# EAGLE board PCB (EAGLE 9.7.0)
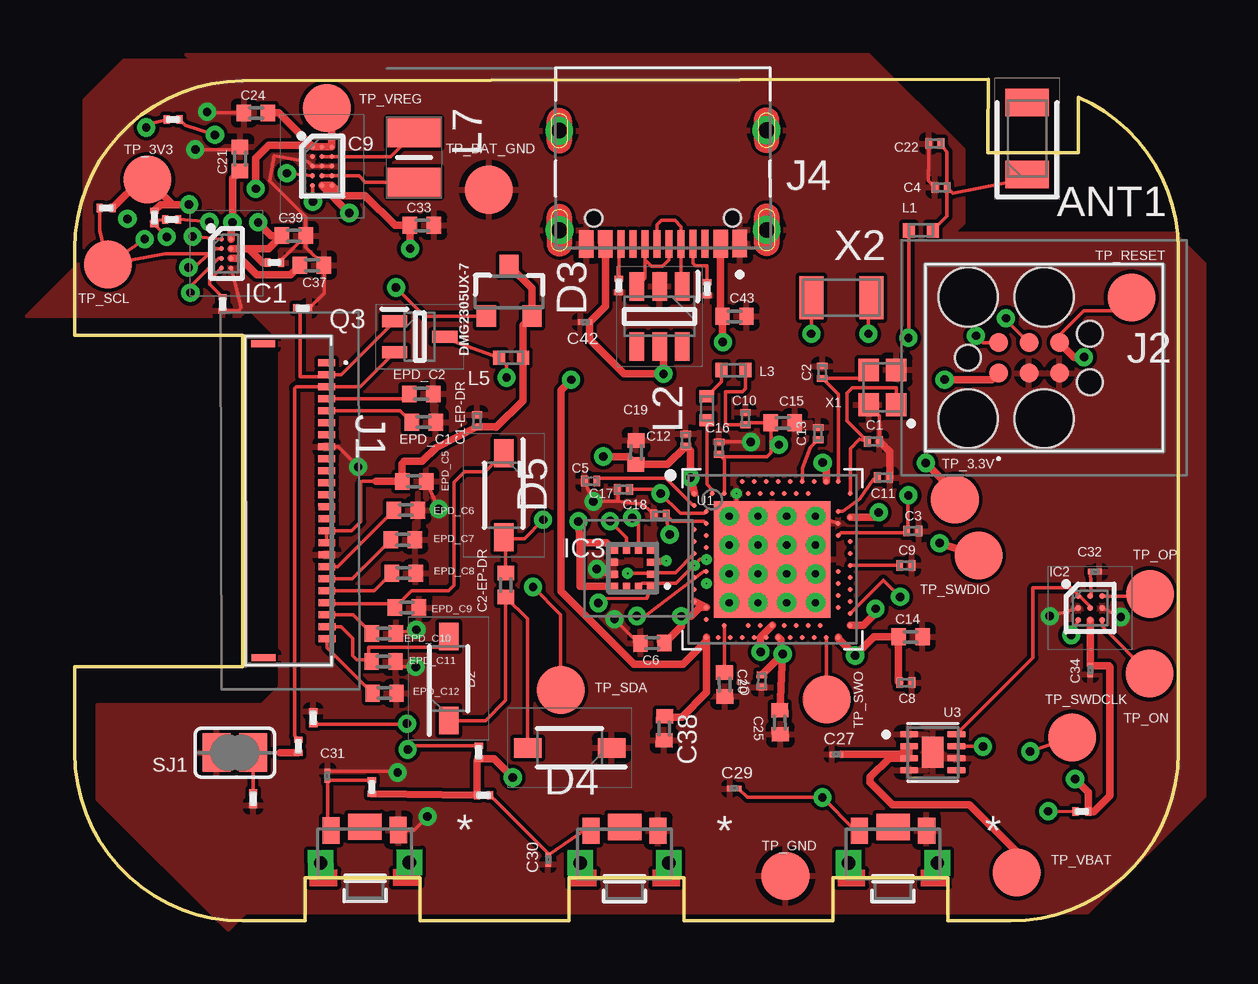
[diagram p0: board, top side]
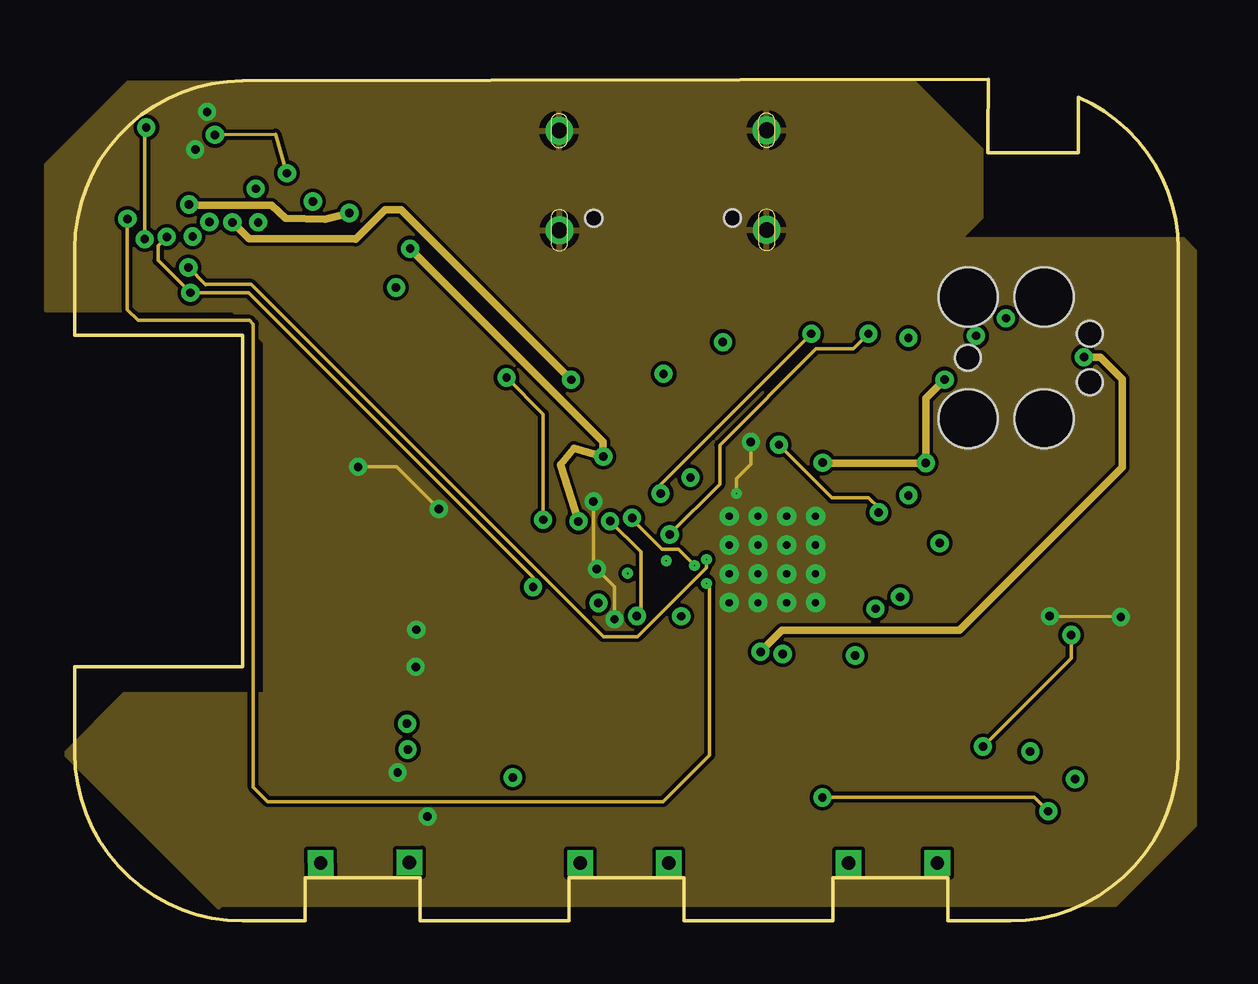
[diagram p1: board, inner layer Route2]
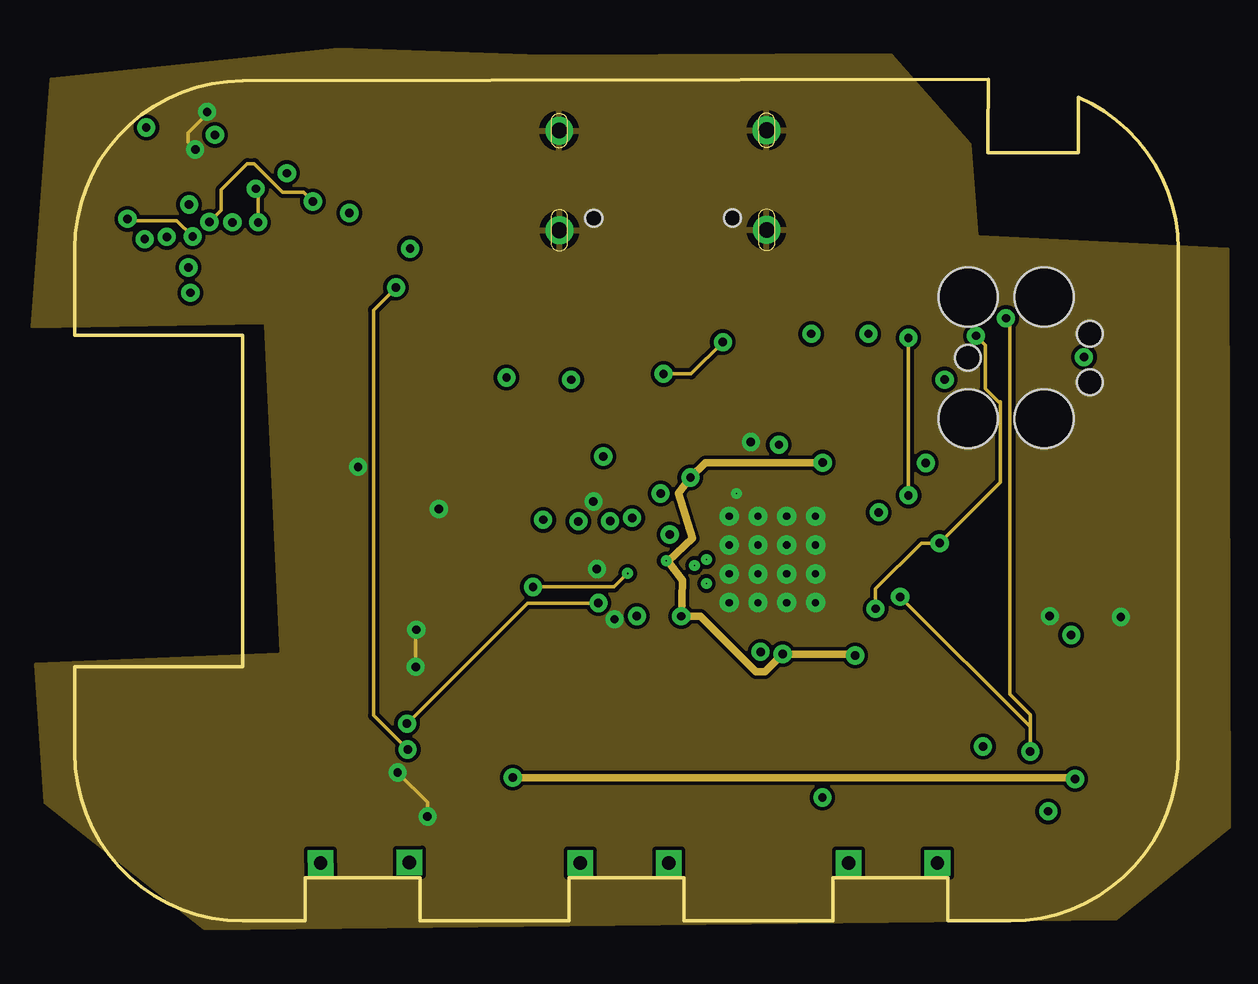
[diagram p2: board, inner layer Route15]
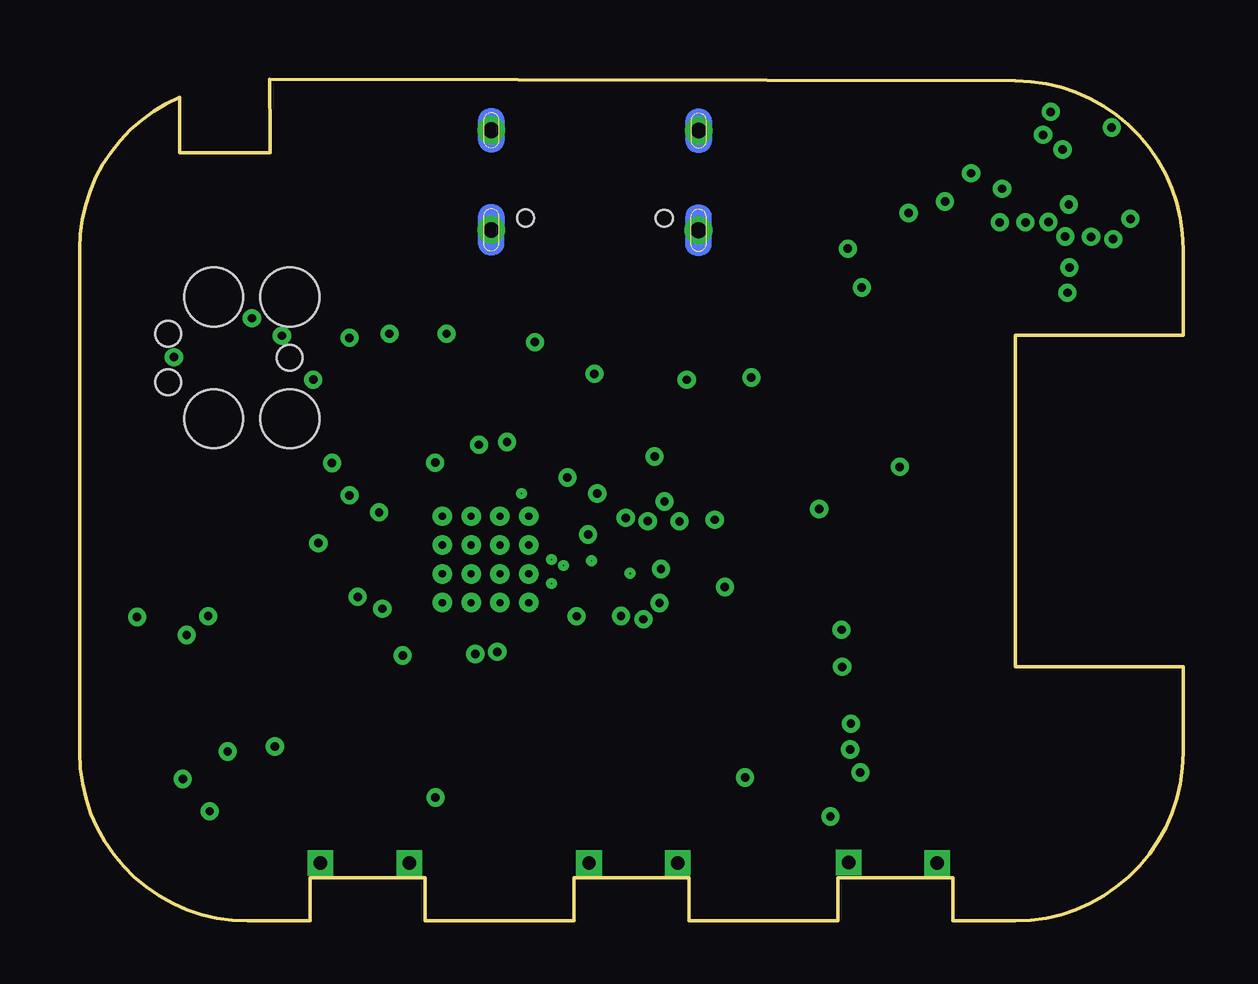
[diagram p3: board, bottom side, seen from below]

Size 46 x 35.07 mm. Coordinates in mm from the lower left corner, seen from the top.
Outline: 39,0 36.4,0 36.4,1.8 31.6,1.8 31.6,0 25.4,0 25.4,1.8 20.6,1.8 20.6,0 14.4,0 14.4,1.8 9.6,1.8 9.6,0 7,0 arc-90 0,7 0,10.6 7,10.6 7,24.4 0,24.4 0,28 arc-90 7,35 38.09,35.07 38.06,32.6 38.06,32 41.83,32 41.83,33.45 41.84,34.32 arc-67 46,28 46,7 arc-90 39,0
Copper layers (1+2*15+16): Top 0.035mm / dielectric 1.5mm / Route2 0.035mm / dielectric 0.15mm / Route15 0.035mm / dielectric 0.2mm / Bottom 0.035mm
Design rules "Fusion Electronics Design Rules.edru *": minimum track width 6mil, minimum drill 0.35mm, track to track 6mil, track to pad 6mil, pad to pad 6mil, via to via 6mil, smd to smd 6mil, copper to edge 0mil, drill to drill 6mil, minimum pad ring 10mil, minimum via ring 8mil, stop-mask expansion 4mil, vias tented up to drill 9999mil, thermal gap 10mil

## Footprints (pad centres in the part's own frame; a part is rotated, then mirrored left to right if it is on the bottom)
2450AT18B100E_ANTC3216X140N = smd 1.15 x 1.8: 1 -1.5,0; 2 1.5,0
NORDIC_NRF_3_RESC0201_L = smd 0.28 x 0.43: 1 -0.255,0; 2 0.255,0
PERFECT_0402_0402 = smd 0.6 x 0.7: 1 -0.5,0; 2 0.5,0
GRM011R60J152KE01L_1_0201 = smd 0.35 x 0.25: 1 0,0.275; 2 0,-0.275
GRM011R60J152KE01L_2_CAPC0201X13N = smd 0.22 x 0.23: 1 -0.185,0; 2 0.185,0
ESP32_C6_LIBRARY_5_SOD3716X135N = smd 1.15 x 0.8: 1 -1.75,0; 2 1.75,0
ESP32_C6_LIBRARY_3_SOT95P280X145-6N = smd 1.2 x 0.6: 1 -1.25,0.95; 2 -1.25,0; 3 -1.25,-0.95; 4 1.25,-0.95; 5 1.25,0; 6 1.25,0.95
ESP32_C6_LIBRARY_4_ESP32_C6_LIBRARY_4_ESP32_C6_LIBRARY_4_ESP32_C6_LIBRARY_4_ESP32_WROVER_SPARKFUN-DISCRETESEMI_SOT23-3 = smd 0.8 x 0.9: 1 -0.95,-1; 2 0.95,-1; 3 0,1.1
BQ25180YBGR_BGA8C40P2X4_100X155X50 = smd 0.2 x 0.2: A1 -0.2,0.6; A2 0.2,0.6; B1 -0.2,0.2; B2 0.2,0.2; C1 -0.2,-0.2; C2 0.2,-0.2; D1 -0.2,-0.6; D2 0.2,-0.6
DRV2605YZFR_BGA9C50P3X3_144X144X62 = smd 0.25 x 0.25: A1 -0.5,0.5; A2 0,0.5; A3 0.5,0.5; B1 -0.5,0; B2 0,0; B3 0.5,0; C1 -0.5,-0.5; C2 0,-0.5; C3 0.5,-0.5
BMA423_BMA423 = smd 0.3 x 0.35: 1 -0.75,-0.775; 2 -0.25,-0.775; 3 0.25,-0.775; 4 0.75,-0.775; 7 0.75,0.775; 8 0.25,0.775; 9 -0.25,0.775; 10 -0.75,0.775 | smd 0.35 x 0.3: 5 0.775,-0.25; 6 0.775,0.25; 11 -0.775,0.25; 12 -0.775,-0.25
RT6160AWSC_BGA15C40P3X5_140X230X60 = smd 0.216 x 0.216: A1 -0.4,0.8; A2 0,0.8; A3 0.4,0.8; B1 -0.4,0.4; B2 0,0.4; B3 0.4,0.4; C1 -0.4,0; C2 0,0; C3 0.4,0; D1 -0.4,-0.4; D2 0,-0.4; D3 0.4,-0.4; E1 -0.4,-0.8; E2 0,-0.8; E3 0.4,-0.8
503480-2400_5034802400 = smd 0.3 x 0.7: 1 -5.75,1.525; 2 -5.25,1.525; 3 -4.75,1.525; 4 -4.25,1.525; 5 -3.75,1.525; 6 -3.25,1.525; 7 -2.75,1.525; 8 -2.25,1.525; 9 -1.75,1.525; 10 -1.25,1.525; 11 -0.75,1.525; 12 -0.25,1.525; 13 0.25,1.525; 14 0.75,1.525; 15 1.25,1.525; 16 1.75,1.525; 17 2.25,1.525; 18 2.75,1.525; 19 3.25,1.525; 20 3.75,1.525; 21 4.25,1.525; 22 4.75,1.525; 23 5.25,1.525; 24 5.75,1.525 | smd 0.3 x 1: MP1 -6.54,-1.125; MP2 6.54,-1.125
TC2030-IDC_TC2030IDC = smd 0.783 x 0.783: 1 -0.953,-0.635; 2 -0.953,0.635; 3 0.317,-0.635; 4 0.317,0.635; 5 1.588,-0.635; 6 1.588,0.635 | hole 2.451: -2.223,-2.54; -2.223,2.54; 0.952,-2.54; 0.952,2.54 | hole 1.067: -2.223,0; 2.857,-1.016; 2.857,1.016
KH-TYPE-C-16P_KINGHELM_KH-TYPE-C-16P = smd 0.6 x 1.15: A1_B12 -3.2,4.725; A4_B9 -2.4,4.725; A9_B4 2.4,4.725; A12_B1 3.2,4.725 | smd 0.3 x 1.15: A5 -1.25,4.725; A6 -0.25,4.725; A7 0.25,4.725; A8 1.25,4.725; B5 1.75,4.725; B6 0.75,4.725; B7 -0.75,4.725; B8 -1.75,4.725 | drill 0.65 pad 1.05: SH1 -4.32,0; SH2 4.32,0; SH3 -4.32,4.15; SH4 4.32,4.15 | hole 0.7: -2.89,3.65; 2.89,3.65
NORDIC_NRF_2_RESC0402_L = smd 0.5 x 0.6: 1 -0.5,0; 2 0.5,0
MLP2016SR47MT0S1_INDC2016X100N = smd 1.2 x 2.2: 1 -1.028,0; 2 1.028,0
ESP32_C6_LIBRARY_6_SOT65P210X110-3N = smd 1.05 x 0.5: 1 -1.05,0.65; 2 -1.05,-0.65; 3 1.05,0
CPF0201D7K68C1_0201 = smd 0.35 x 0.25: 1 0,0.275; 2 0,-0.275
ESP32_C6_LIBRARY_7_JUMPER_SJ = smd 1.168 x 1.6: 1 -0.762,0; 2 0.762,0
2025-10-22_07-23-44_LIBRARY_SW_EVP-AKE31A_PAN = smd 0.711 x 1.092: 1 -1.4,-0.972; 2 1.4,-0.972 | drill 0.559 pad 0.914 square: 3 -1.848,0.381; 4 1.848,0.381 | smd 1.397 x 1.092: 5 0,-1.124
HECTOR_WATCH_1_TP20R = smd 2 x 2: TP 0,0
NORDIC_NRF_4_AQFN50P700X700X85_HS-74N = smd 4.85 x 4.85: P$74 0,0 | drill 0.3 pad 0.6: P$75 -1.8,1.8; P$76 -0.6,1.8; P$77 0.6,1.8; P$78 1.8,1.8; P$79 -1.8,0.6; P$80 -0.6,0.6; P$81 0.6,0.6; P$82 1.8,0.6; P$83 -1.8,-0.6; P$84 -0.6,-0.6; P$85 0.6,-0.6; P$86 1.8,-0.6; P$87 -1.8,-1.8; P$88 -0.6,-1.8; P$89 0.6,-1.8; P$90 1.8,-1.8 | smd 0.2 x 0.2: P$A8 -1.25,3.25; P$A10 -0.75,3.25; P$A12 -0.25,3.25; P$A14 0.25,3.25; P$A16 0.75,3.25; P$A18 1.25,3.25; P$A20 1.75,3.25; P$A22 2.25,3.25; P$A23 2.75,3.25; P$AA24 3.25,-2.25; P$AB2 -2.75,-2.5; P$AC5 -2,-2.75; P$AC9 -1,-2.75; P$AC11 -0.5,-2.75; P$AC13 0,-2.75; P$AC15 0.5,-2.75; P$AC17 1,-2.75; P$AC19 1.5,-2.75; P$AC21 2,-2.75; P$AC24 3.25,-2.75; P$AD2 -2.75,-3.25; P$AD4 -2.25,-3.25; P$AD6 -1.75,-3.25; P$AD8 -1.25,-3.25; P$AD10 -0.75,-3.25; P$AD12 -0.25,-3.25; P$AD14 0.25,-3.25; P$AD16 0.75,-3.25; P$AD18 1.25,-3.25; P$AD20 1.75,-3.25; P$AD22 2.25,-3.25; P$AD23 2.75,-3.25; P$B1 -3.25,2.75; P$B3 -2.5,2.75; P$B5 -2,2.75; P$B7 -1.5,2.75; P$B9 -1,2.75; P$B11 -0.5,2.75; P$B13 0,2.75; P$B15 0.5,2.75; P$B17 1,2.75; P$B19 1.5,2.75; P$B24 3.25,2.75; P$C1 -3.25,2.25; P$D2 -2.75,2; P$D23 2.75,2; P$E24 3.25,1.75; P$F2 -2.75,1.5; P$F23 2.75,1.5; P$G1 -3.25,1.25; P$H2 -2.75,1; P$H23 2.75,1; P$J1 -3.25,0.75; P$J24 3.25,0.75; P$K2 -2.75,0.5; P$L1 -3.25,0.25; P$L24 3.25,0.25; P$M2 -2.75,0; P$N1 -3.25,-0.25; P$N24 3.25,-0.25; P$P2 -2.75,-0.5; P$P23 2.75,-0.5; P$R1 -3.25,-0.75; P$R24 3.25,-0.75; P$T2 -2.75,-1; P$T23 2.75,-1; P$U1 -3.25,-1.25; P$U24 3.25,-1.25; P$V23 2.75,-1.5; P$W1 -3.25,-1.75; P$W24 3.25,-1.75; P$Y2 -2.75,-2; P$Y23 2.75,-2
ESP32_C6_LIBRARY_SON50P200X200X80-9N = smd 0.76 x 0.27: 1 -0.985,0.75; 2 -0.985,0.25; 3 -0.985,-0.25; 4 -0.985,-0.75; 5 0.985,-0.75; 6 0.985,-0.25; 7 0.985,0.25; 8 0.985,0.75 | smd 0.9 x 1.3: 9 0,0
NORDIC_NRF_BT-XTAL_2016_N = smd 0.95 x 0.85: 1 -0.725,-0.575; 2 0.725,-0.575; 3 0.725,0.575; 4 -0.725,0.575
NORDIC_NRF_1_XTAL_3215_N = smd 1 x 1.8: 1 -1.25,0; 2 1.25,0

## Placement (x,y rotation side)
ANT1  2450AT18B100E  [2450AT18B100E_ANTC3216X140N]  39.7,32.6 90 top
C1  12pF  [NORDIC_NRF_3_RESC0201_L]  33.3,19.98 0 top
C1-EP-DR  10uF  [NORDIC_NRF_3_RESC0201_L]  16.77,20.84 90 top
C2  12pF  [NORDIC_NRF_3_RESC0201_L]  31.16,22.86 90 top
C2-EP-DR  4.7uF/25V  [PERFECT_0402_0402]  17.97,13.99 90 top
C3  1pF  [NORDIC_NRF_3_RESC0201_L]  34.94,16.24 0 top
C4  1pF  [NORDIC_NRF_3_RESC0201_L]  36.11,30.56 180 top
C5  100nF  [NORDIC_NRF_3_RESC0201_L]  21.51,18.33 179.6 top
C6  4.7μF  [PERFECT_0402_0402]  24.08,11.57 181.1 top
C7  100nF  [NORDIC_NRF_3_RESC0201_L]  28.64,10 269.3 top
C8  100nF  [NORDIC_NRF_3_RESC0201_L]  34.64,9.93 0 top
C9  820pF N.C.  [NORDIC_NRF_3_RESC0201_L]  34.64,14.81 0 top
C10  N.C.  [NORDIC_NRF_3_RESC0201_L]  27.96,20.93 90 top
C11  100pF  [NORDIC_NRF_3_RESC0201_L]  33.72,18.48 0 top
C12  100nF  [NORDIC_NRF_3_RESC0201_L]  25.47,20.03 90.4 top
C13  N.C.  [NORDIC_NRF_3_RESC0201_L]  30.99,20.3 90 top
C14  4.7μF  [PERFECT_0402_0402]  34.84,11.84 0 top
C15  1.0μF  [PERFECT_0402_0402]  29.52,20.76 0.4 top
C16  47nF  [NORDIC_NRF_3_RESC0201_L]  26.86,19.7 89.7 top
C17  12pF  [NORDIC_NRF_3_RESC0201_L]  22.87,17.98 0 top
C18  12pF  [NORDIC_NRF_3_RESC0201_L]  24.41,16.91 0 top
C19  100nF  [PERFECT_0402_0402]  23.4,19.52 89.2 top
C20  4.7μF  [PERFECT_0402_0402]  27.09,9.85 270.5 top
C21  4.7μF  [PERFECT_0402_0402]  6.89,31.75 90 top
C22  N.C.  [NORDIC_NRF_3_RESC0201_L]  35.85,32.39 180 top
C23  0.1uF  [GRM011R60J152KE01L_1_0201]  8.32,27.43 90 top
C24  10uF  [PERFECT_0402_0402]  7.56,33.66 0 top
C25  22uF  [PERFECT_0402_0402]  29.4,8.28 271.1 top
C27  0.1uF  [GRM011R60J152KE01L_2_CAPC0201X13N]  31.76,6.94 0 top
C29  1uF  [GRM011R60J152KE01L_2_CAPC0201X13N]  27.49,5.52 0 top
C30  1uF  [GRM011R60J152KE01L_2_CAPC0201X13N]  19.74,2.55 90 top
C31  1uF  [GRM011R60J152KE01L_2_CAPC0201X13N]  10.54,6.05 269.9 top
C32  1uF  [GRM011R60J152KE01L_2_CAPC0201X13N]  42.52,14.56 180 top
C33  22uF  [PERFECT_0402_0402]  14.48,28.98 0 top
C34  0.1uF  [GRM011R60J152KE01L_2_CAPC0201X13N]  42.33,10.45 90 top
C37  1uF  [PERFECT_0402_0402]  9.89,27.33 0 top
C38  1uF  [PERFECT_0402_0402]  24.58,8.02 269.2 top
C39  10uF  [PERFECT_0402_0402]  9.14,28.56 0 top
C42  0.1uF  [GRM011R60J152KE01L_2_CAPC0201X13N]  21.27,24.95 180 top
C43  4.7uF  [PERFECT_0402_0402]  27.5,25.19 0 top
D2  MBR0530  [ESP32_C6_LIBRARY_5_SOD3716X135N]  15.59,10.09 90 top
D3  USBLC6-2SC6Y  [ESP32_C6_LIBRARY_3_SOT95P280X145-6N]  24.38,25.19 270 top
D4  MBR0530  [ESP32_C6_LIBRARY_5_SOD3716X135N]  20.63,7.21 180 top
D5  MBR0530  [ESP32_C6_LIBRARY_5_SOD3716X135N]  17.88,17.74 270 top
DMG2305UX-7  20V/4.2A/52mΩ/1.4W  [ESP32_C6_LIBRARY_4_ESP32_C6_LIBRARY_4_ESP32_C6_LIBRARY_4_ESP32_C6_LIBRARY_4_ESP32_WROVER_SPARKFUN-DISCRETESEMI_SOT23-3]  18.11,26.2 0 top
EPD_C1  1uF/50V  [PERFECT_0402_0402]  14.55,20.78 180 top
EPD_C2  1uF/50V  [PERFECT_0402_0402]  14.45,21.96 180 top
EPD_C5  0.1uF/50V  [PERFECT_0402_0402]  14.15,18.31 180 top
EPD_C6  1uF/50V  [PERFECT_0402_0402]  13.81,17.11 180 top
EPD_C7  1uF/50V  [PERFECT_0402_0402]  13.68,15.88 180 top
EPD_C8  1uF/50V  [PERFECT_0402_0402]  13.72,14.49 180 top
EPD_C9  1uF/50V  [PERFECT_0402_0402]  13.85,13.06 180 top
EPD_C10  1uF/50V  [PERFECT_0402_0402]  12.89,11.97 180 top
EPD_C11  1uF/50V  [PERFECT_0402_0402]  12.88,10.81 180 top
EPD_C12  1uF/50V  [PERFECT_0402_0402]  12.92,9.49 180 top
IC1  BQ25180YBGR  [BQ25180YBGR_BGA8C40P2X4_100X155X50]  6.32,27.81 0 top
IC2  DRV2605YZFR  [DRV2605YZFR_BGA9C50P3X3_144X144X62]  42.32,13.04 0 top
IC3  BMA423  [BMA423_BMA423]  23.25,14.7 90 top
IC9  RT6160AWSC  [RT6160AWSC_BGA15C40P3X5_140X230X60]  10.31,31.45 0 top
J1  503480-2400  [503480-2400_5034802400]  8.98,17.51 270.1 top
J2  TC2030-IDC  [TC2030-IDC_TC2030IDC]  39.46,23.46 0 top
J4  KH-TYPE-C-16P  [KH-TYPE-C-16P_KINGHELM_KH-TYPE-C-16P]  24.52,32.94 180.1 top
L1  3.9nH  [NORDIC_NRF_2_RESC0402_L]  35.26,28.77 0 top
L2  10μH  [NORDIC_NRF_2_RESC0402_L]  26.35,21.35 90 top
L3  15μH  [NORDIC_NRF_2_RESC0402_L]  27.45,22.95 0 top
L5  68uH  [NORDIC_NRF_2_RESC0402_L]  18.18,23.47 180 top
L7  FTC252012SR47MBCA  [MLP2016SR47MT0S1_INDC2016X100N]  14.15,31.81 270 top
Q3  SI1308EDL-T1-GE3  [ESP32_C6_LIBRARY_6_SOT65P210X110-3N]  14.38,24.34 0 top
R1_EP_DR  0.47  [CPF0201D7K68C1_0201]  9.32,7.28 180 top
R1_USB  5K1  [CPF0201D7K68C1_0201]  26.37,26.35 180 top
R2  0  [CPF0201D7K68C1_0201]  4.05,29.23 90 top
R2_EP_DR  10K  [CPF0201D7K68C1_0201]  9.5,25.53 270 top
R2_USB  5K1  [CPF0201D7K68C1_0201]  22.68,26.48 0 top
R3  0  [CPF0201D7K68C1_0201]  9.94,8.46 0 top
R4  0  [CPF0201D7K68C1_0201]  4.1,33.39 90 top
R5  10k  [CPF0201D7K68C1_0201]  17.04,5.24 270 top
R7  10k  [CPF0201D7K68C1_0201]  41.98,4.56 90 top
R8  10k  [CPF0201D7K68C1_0201]  12.39,5.58 0 top
R9  10k  [CPF0201D7K68C1_0201]  6.17,25.7 180 top
R17  3K3  [CPF0201D7K68C1_0201]  1.32,29.71 270 top
R18  3K3  [CPF0201D7K68C1_0201]  3.32,29.31 0 top
R_PWR_EPD  10K  [CPF0201D7K68C1_0201]  16.84,7.02 0 top
R_TYPE_SEL  2.2  [CPF0201D7K68C1_0201]  7.44,5.09 180 top
SJ1  [ESP32_C6_LIBRARY_7_JUMPER_SJ]  6.68,7.01 0 top
SW_DN  2025-10-22_07-23-44_LIBRARY_EVP-AKE31ASW_EVP-AKE31A_PAN  [2025-10-22_07-23-44_LIBRARY_SW_EVP-AKE31A_PAN]  34.11,2.79 180 top
SW_ENT  2025-10-22_07-23-44_LIBRARY_EVP-AKE31ASW_EVP-AKE31A_PAN  [2025-10-22_07-23-44_LIBRARY_SW_EVP-AKE31A_PAN]  12.1,2.81 180.4 top
SW_UP  2025-10-22_07-23-44_LIBRARY_EVP-AKE31ASW_EVP-AKE31A_PAN  [2025-10-22_07-23-44_LIBRARY_SW_EVP-AKE31A_PAN]  22.92,2.79 180 top
TP_3.3V  HECTOR_WATCH_1_TPTP20R  [HECTOR_WATCH_1_TP20R]  36.69,17.57 0 top
TP_3V3  HECTOR_WATCH_1_TPTP20R  [HECTOR_WATCH_1_TP20R]  3.03,30.89 0 top
TP_BAT_GND  HECTOR_WATCH_1_TPTP20R  [HECTOR_WATCH_1_TP20R]  17.27,30.46 0 top
TP_GND  HECTOR_WATCH_1_TPTP20R  [HECTOR_WATCH_1_TP20R]  29.63,1.88 0 top
TP_ON  HECTOR_WATCH_1_TPTP20R  [HECTOR_WATCH_1_TP20R]  44.8,10.3 0 top
TP_OP  HECTOR_WATCH_1_TPTP20R  [HECTOR_WATCH_1_TP20R]  44.82,13.63 0 top
TP_RESET  HECTOR_WATCH_1_TPTP20R  [HECTOR_WATCH_1_TP20R]  44.05,25.98 0 top
TP_SCL  HECTOR_WATCH_1_TPTP20R  [HECTOR_WATCH_1_TP20R]  1.39,27.36 0 top
TP_SDA  HECTOR_WATCH_1_TPTP20R  [HECTOR_WATCH_1_TP20R]  20.25,9.62 0 top
TP_SWDCLK  HECTOR_WATCH_1_TPTP20R  [HECTOR_WATCH_1_TP20R]  41.57,7.65 0 top
TP_SWDIO  HECTOR_WATCH_1_TPTP20R  [HECTOR_WATCH_1_TP20R]  37.67,15.23 0 top
TP_SWO  HECTOR_WATCH_1_TPTP20R  [HECTOR_WATCH_1_TP20R]  31.34,9.22 0 top
TP_VBAT  HECTOR_WATCH_1_TPTP20R  [HECTOR_WATCH_1_TP20R]  39.26,2.02 0 top
TP_VREG  HECTOR_WATCH_1_TPTP20R  [HECTOR_WATCH_1_TP20R]  10.51,33.87 0 top
U1  NRF52840_QF  [NORDIC_NRF_4_AQFN50P700X700X85_HS-74N]  29.08,15.06 0 top
U3  MAX17048G+T10  [ESP32_C6_LIBRARY_SON50P200X200X80-9N]  35.76,7.03 0 top
X1  32MHz  [NORDIC_NRF_BT-XTAL_2016_N]  33.67,22.23 90 top
X2  32.768kHz  [NORDIC_NRF_1_XTAL_3215_N]  31.95,25.97 0 top

## Library data of the parts
ANT1 = InkTime_v5; ARROW_PART_NUMBER: 2450AT18B100E; ARROW_PRICE-STOCK: https://www.arrow.com/en/products/2450at18b100e/johanson-dielectrics?utm_currency=USD&region=nac; DESCRIPTION: Antennas 2.45GHz ANTENNA; HEIGHT: 1.4mm; MANUFACTURER_NAME: JOHANSON TECHNOLOGY; MANUFACTURER_PART_NUMBER: 2450AT18B100E; MOUSER_PART_NUMBER: 609-2450AT18B100E; MOUSER_PRICE-STOCK: https://www.mouser.co.uk/ProductDetail/Johanson-Technology/2450AT18B100E?qs=yCnrNFeXz%252Bh5MFsFIXGZGA%3D%3D
C1 C1-EP-DR C2 C2-EP-DR C3-C25 C33 C37-C39 C43 EPD_C1 EPD_C2 EPD_C5-EPD_C12 L1-L3 L5 R1_EP_DR R1_USB R2 R2_EP_DR R2_USB R3-R5 R7-R9 R17 R18 R_PWR_EPD R_TYPE_SEL SJ1 TP_3.3V TP_3V3 TP_BAT_GND TP_GND TP_ON TP_OP TP_RESET TP_SCL TP_SDA TP_SWDCLK TP_SWDIO TP_SWO TP_VBAT TP_VREG U1 X1 X2 = InkTime_v5
C27 C29-C32 C34 C42 = InkTime_v5; AVAILABILITY: In Stock; CHECK_PRICES: https://www.snapeda.com/parts/GRM011R60J152KE01L/Murata/view-part/?ref=eda; DESCRIPTION: SMD Capacitor X5R(EIA) with Capacitance: 1500pF Tol. 10%. Rated Voltage: 6.3Vdc; MF: Murata; MP: GRM011R60J152KE01L; PACKAGE: 0201 Murata; PRICE: None; SNAPEDA_LINK: https://www.snapeda.com/parts/GRM011R60J152KE01L/Murata/view-part/?ref=snap
D2 D4 D5 = InkTime_v5; AVAILABILITY: In Stock; CHECK_PRICES: https://www.snapeda.com/parts/MBR0530/Onsemi/view-part/?ref=eda; DESCRIPTION: Diode Schottky 30 V 500mA Surface Mount SOD-123; MF: ON Semiconductor; MP: MBR0530; PACKAGE: SOD-123-2 ON Semiconductor; PRICE: None; PURCHASE-URL: https://www.snapeda.com/api/url_track_click_mouser/?unipart_id=179458&manufacturer=ON Semiconductor&part_name=MBR0530&search_term=None; SNAPEDA_LINK: https://www.snapeda.com/parts/MBR0530/Onsemi/view-part/?ref=snap
D3 = InkTime_v5; AVAILABILITY: In Stock; CHECK_PRICES: https://www.snapeda.com/parts/USBLC6-2SC6Y/STMicroelectronics/view-part/?ref=eda; DESCRIPTION: 17V Clamp 5A (8/20µs) Ipp Tvs Diode Surface Mount SOT-23-6; MF: STMicroelectronics; MP: USBLC6-2SC6Y; PACKAGE: SOT-23-6 STMicroelectronics; PRICE: None; SNAPEDA_LINK: https://www.snapeda.com/parts/USBLC6-2SC6Y/STMicroelectronics/view-part/?ref=snap
DMG2305UX-7 = InkTime_v5; PROD_ID: TRAN-14388
IC1 = InkTime_v5; ARROW_PART_NUMBER: BQ25180YBGR; ARROW_PRICE-STOCK: https://www.arrow.com/en/products/bq25180ybgr/texas-instruments?utm_currency=USD&region=nac; DESCRIPTION: Charger IC Lithium Ion/Polymer, Lithium Iron Phosphate 8-DSBGA (1.6x1.1); HEIGHT: 0.5mm; MANUFACTURER_NAME: Texas Instruments; MANUFACTURER_PART_NUMBER: BQ25180YBGR; MOUSER_PART_NUMBER: 595-BQ25180YBGR; MOUSER_PRICE-STOCK: https://www.mouser.co.uk/ProductDetail/Texas-Instruments/BQ25180YBGR?qs=doiCPypUmgEWjAK%252BJAX6Tw%3D%3D
IC2 = InkTime_v5; ARROW_PART_NUMBER: DRV2605YZFR; ARROW_PRICE-STOCK: https://www.arrow.com/en/products/drv2605yzfr/texas-instruments?region=nac; DESCRIPTION: Haptic Driver for ERM/LRA with Built-In Library and Smart Loop Architecture; HEIGHT: 0.625mm; MANUFACTURER_NAME: Texas Instruments; MANUFACTURER_PART_NUMBER: DRV2605YZFR
IC3 = InkTime_v5; ARROW_PART_NUMBER: BMA423; ARROW_PRICE-STOCK: https://www.arrow.com/en/products/bma423/bosch; DESCRIPTION: Accelerometers Triaxial low-g 12bit Acceleration Sensor; HEIGHT: 1mm; MANUFACTURER_NAME: BOSCH; MANUFACTURER_PART_NUMBER: BMA423; MOUSER_PART_NUMBER: 262-BMA423; MOUSER_PRICE-STOCK: https://www.mouser.co.uk/ProductDetail/Bosch-Sensortec/BMA423?qs=HXFqYaX1Q2xC%252BSgeGoX3mg%3D%3D
IC9 = InkTime_v5; DESCRIPTION: Buck-Boost Regulator Positive Output Step-Up/Step-Down I2C DC-DC Controller IC 15-WL-CSP (BSC) (1.4x2.3); HEIGHT: 0.6mm; MANUFACTURER_NAME: RICHTEK; MANUFACTURER_PART_NUMBER: RT6160AWSC; MOUSER_PART_NUMBER: 835-RT6160AWSC; MOUSER_PRICE-STOCK: https://www.mouser.co.uk/ProductDetail/Richtek/RT6160AWSC?qs=amGC7iS6iy%2FLd9PSoixZXQ%3D%3D
J1 = InkTime_v5; DESCRIPTION: FFC & FPC Connectors 0.5mm FPC RA SMT Dual Contact 24Ckt; HEIGHT: 1.87mm; MANUFACTURER_NAME: Molex; MANUFACTURER_PART_NUMBER: 503480-2400; MOUSER_PART_NUMBER: 538-503480-2400; MOUSER_PRICE-STOCK: https://www.mouser.co.uk/ProductDetail/Molex/503480-2400?qs=OAhjpuo3Vu7efIoxFh9AOw%3D%3D
J2 = InkTime_v5; DESCRIPTION: CABLE ADAPTER 6 POS; HEIGHT: 19mm; MANUFACTURER_NAME: Tag Connect; MANUFACTURER_PART_NUMBER: TC2030-IDC
J4 = InkTime_v5; AVAILABILITY: Not in stock; CHECK_PRICES: https://www.snapeda.com/parts/KH-TYPE-C-16P/Kinghelm/view-part/?ref=eda; MF: kinghelm; MP: KH-TYPE-C-16P; PACKAGE: None; PRICE: None; SNAPEDA_LINK: https://www.snapeda.com/parts/KH-TYPE-C-16P/Kinghelm/view-part/?ref=snap
L7 = InkTime_v5; DESCRIPTION: SMD / SMT Inductors (Coils), L=0.47?H, L x W x T :; HEIGHT: 1mm; JLCPCB: https://jlcpcb.com/partdetail/6763488-FTC252012SR47MBCA/C5832368; MANUFACTURER_NAME: TDK; MANUFACTURER_PART_NUMBER: FTC252012SR47MBCA
Q3 = InkTime_v5; AVAILABILITY: In Stock; CHECK_PRICES: https://www.snapeda.com/parts/SI1308EDL-T1-GE3/Vishay+Siliconix/view-part/?ref=eda; DESCRIPTION: Si1308EDL-T1-GE3 N-channel MOSFET Transistor, 1.5 A, 30 V, 3-Pin SC-70 | Siliconix / Vishay SI1308EDL-T1-GE3; MF: Vishay Siliconix; MP: SI1308EDL-T1-GE3; PACKAGE: SOT-323 Vishay Semiconductor; PRICE: None; PURCHASE-URL: https://www.snapeda.com/api/url_track_click_mouser/?unipart_id=274603&manufacturer=Vishay Siliconix&part_name=SI1308EDL-T1-GE3&search_term=None; SNAPEDA_LINK: https://www.snapeda.com/parts/SI1308EDL-T1-GE3/Vishay+Siliconix/view-part/?ref=snap
SW_DN SW_ENT SW_UP = InkTime_v5; COPYRIGHT: Copyright (C) 2025 Ultra Librarian. All rights reserved.; DIGI-KEY_PART_NUMBER_1: P123437TR-ND; DIGI-KEY_PART_NUMBER_2: P123437CT-ND; DIGI-KEY_PART_NUMBER_3: P123437DKR-ND; MANUFACTURER_NAME: Panasonic; MANUFACTURER_PART_NUMBER: EVP-AKE31A
U3 = InkTime_v5; AVAILABILITY: In Stock; CHECK_PRICES: https://www.snapeda.com/parts/MAX17048G+T10/Analog+Devices/view-part/?ref=eda; DESCRIPTION: 3µA 1-Cell/2-Cell Fuel Gauge with ModelGauge; MF: Analog Devices; MP: MAX17048G+T10; PACKAGE: TDFN-8 Maxim; PRICE: None; PURCHASE-URL: https://www.snapeda.com/api/url_track_click_mouser/?unipart_id=329239&manufacturer=Analog Devices&part_name=MAX17048G+T10&search_term=None; SNAPEDA_LINK: https://www.snapeda.com/parts/MAX17048G+T10/Analog+Devices/view-part/?ref=snap

## Nets
3V3/1.7D: C34.2 IC2.C2 R5.2 R7.2 R8.2 R_PWR_EPD.2
3V3/2.4A: C6.1 C7.1 C8.1 C12.1 C14.1 C19.1 C25.1 C33.1 IC3.3 IC3.7 IC3.10 IC9.E2 IC9.E3 J2.1 R17.1 R18.1 TP_3.3V.TP TP_3V3.TP U1.P$A22 U1.P$AD14 U1.P$AD23 U1.P$B1 U1.P$W1 U1.P$Y2
ALERT/1.6C: U3.5
ALERT/2.5C: U1.P$J24
D+/1.5D: D3.4
D+/2.7D: U1.P$AD6
D-/1.5D: D3.6
D-/2.7D: U1.P$AD4
DEC1: C5.1 U1.P$C1
DEC3: C11.1 U1.P$D23
DEC4_6: C10.1 C15.1 C16.1 L3.2 U1.P$B5 U1.P$E24
DN: D3.1 J4.A7 J4.B7
DP: D3.3 J4.A6 J4.B6
EPD_3V3: C1-EP-DR.1 DMG2305UX-7.2 DMG2305UX-7.3 EPD_C5.2 J1.15 J1.16 L5.1
EPD_BUSY/1.5D: J1.9
EPD_BUSY/2.2D: U1.P$AD12
EPD_CS/1.4C: J1.12
EPD_CS/2.2D: U1.P$K2
EPD_DC/1.5D: J1.11
EPD_DC/2.2D: U1.P$AD10
EPD_RST/1.5D: J1.10
EPD_RST/2.2D: U1.P$AC11
GDR: J1.2 Q3.1 R2_EP_DR.2
GND: C1-EP-DR.2 C1.2 C2.2 C3.2 C4.2 C5.2 C6.2 C7.2 C8.2 C9.2 C10.2 C11.2 C12.2 C13.2 C14.2 C15.2 C16.2 C17.1 C18.1 C19.2 C20.2 C21.2 C22.2 C23.2 C24.1 C25.2 C27.1 C29.1 C30.1 C31.1 C32.1 C33.2 C34.1 C37.2 C38.2 C39.2 C42.2 C43.2 D3.2 D4.1 EPD_C1.1 EPD_C2.1 EPD_C5.1 EPD_C6.1 EPD_C7.1 EPD_C8.1 EPD_C9.1 EPD_C10.1 EPD_C11.1 EPD_C12.1 IC1.D2 IC2.B1 IC2.B3 IC3.8 IC3.9 IC9.B1 IC9.C1 IC9.C2 IC9.C3 J1.8 J1.17 J1.MP1 J1.MP2 J2.3 J2.5 J4.A1_B12 J4.A12_B1 J4.SH1 J4.SH2 J4.SH3 J4.SH4 R1_USB.1 R2_EP_DR.1 R2_USB.2 R3.1 R9.1 R_TYPE_SEL.1 SJ1.1 SW_DN.1 SW_ENT.1 SW_UP.1 TP_BAT_GND.TP TP_GND.TP U1.P$74 U1.P$75 U1.P$76 U1.P$77 U1.P$78 U1.P$79 U1.P$80 U1.P$81 U1.P$82 U1.P$83 U1.P$84 U1.P$85 U1.P$86 U1.P$87 U1.P$88 U1.P$89 U1.P$90 U1.P$B7 U1.P$F23 U3.1 U3.4 U3.6 U3.9 X1.2 X1.4
HAPTIC_EN/1.4C: IC2.A1
HAPTIC_EN/2.6A: U1.P$U1
IMU_INT1: IC3.5 U1.P$N1
IMU_INT2: IC3.6 U1.P$P2
LX1: IC9.B2 IC9.B3 L7.1
LX2: IC9.D2 IC9.D3 L7.2
MOSI/1.5B: J1.14
MOSI/2.2D: U1.P$B13
N$1: IC1.D1 R9.2
N$2: IC9.D1 R4.2
N$3: IC9.E1 R2.2
N$4: C20.1 U1.P$AC5
N$5: C2-EP-DR.1 D2.1 D4.2
N$6: C9.1 U1.P$N24
N$7: C2-EP-DR.2 D5.2 L5.2 Q3.3
N$8: C3.1 L1.1 U1.P$H23
N$9: IC3.1 R3.2
N$10: C1.1 U1.P$B24 X1.1
N$11: J4.B5 R2_USB.1
N$12: R1_EP_DR.1 R_TYPE_SEL.2 SJ1.2
N$13: C13.1 U1.P$A18
N$14: ANT1.1 C4.1 C22.1 L1.2
N$15: C32.2 IC2.A2
N$16: J4.A5 R1_USB.2
N$19: C2.1 U1.P$A23 X1.3
N$20: L2.2 L3.1
N$21: L2.1 U1.P$B3
N$27: EPD_C6.2 J1.18
N$28: EPD_C7.2 J1.19
N$29: EPD_C8.2 J1.20
N$31: EPD_C10.2 J1.22
N$33: EPD_C12.2 J1.24
N$34: EPD_C2.2 J1.4
N$35: EPD_C1.2 J1.5
OUT+: IC2.A3 TP_OP.TP
OUT-: IC2.C3 TP_ON.TP
P0.00/XL1: C17.2 U1.P$D2 X2.1
P0.01/XL2: C18.2 U1.P$F2 X2.2
P0.04: U1.P$J1
P0.09: U1.P$L24
P0.13/1.5D: C30.2 R5.1 SW_UP.2
P0.13/2.6C: U1.P$AD8
P0.14/1.5D: C31.2 R8.1 SW_ENT.2
P0.14/2.7C: U1.P$AC9
P0.19: U1.P$AC15
P0.20: U1.P$AD16
P0.21: U1.P$AC17
P0.22: U1.P$AD18
P0.23: U1.P$AC19
P0.24: U1.P$AD20
P0.25: U1.P$AC21
P0.26: U1.P$G1
P0.27: U1.P$H2
P0.28: U1.P$B11
P0.29: U1.P$A10
P0.30: U1.P$B9
P0.31: U1.P$A8
P1.01/1.6C: DMG2305UX-7.1 R_PWR_EPD.1
P1.01/2.4B: U1.P$Y23
P1.02/1.6C: C29.2 R7.1 SW_DN.2
P1.02/2.8C: U1.P$W24
P1.03: U1.P$V23
P1.04: U1.P$U24
P1.05: U1.P$T23
P1.06: U1.P$R24
P1.07: U1.P$P23
P1.09: U1.P$R1
P1.10: U1.P$A20
P1.11: U1.P$B19
P1.12: U1.P$B17
P1.13: U1.P$A16
P1.14: U1.P$B15
P1.15: U1.P$A14
PMIC_INT: IC1.A1 U1.P$T2
PREVGH: D5.1 EPD_C9.2 J1.21
PREVGL: D2.2 EPD_C11.2 J1.23
RESE: J1.3 Q3.2 R1_EP_DR.2
RESET: J2.6 TP_RESET.TP U1.P$AC13
SCK/1.5B: J1.13
SCK/2.2D: U1.P$A12
SCL/1.4C: IC2.C1 U3.7
SCL/2.4C: IC1.B1 IC3.12 R4.1 R17.2 TP_SCL.TP U1.P$M2
SDA/1.4C: IC2.B2 U3.8
SDA/2.4C: IC1.C1 IC3.2 R2.1 R18.2 TP_SDA.TP U1.P$L1
SWDCLK: J2.4 TP_SWDCLK.TP U1.P$AA24
SWDIO: J2.2 TP_SWDIO.TP U1.P$AC24
SWO: TP_SWO.TP U1.P$AD22
VBAT/1.2A: C27.2 TP_VBAT.TP U3.2 U3.3
VBAT/2.5C: C37.1 IC1.C2
VBUS/1.5D: C42.1 C43.1 D3.5 J4.A4_B9 J4.A9_B4
VBUS/2.6D: C21.1 C38.1 IC1.A2 U1.P$AD2
VREG: C23.1 C24.2 C39.1 IC1.B2 IC9.A1 IC9.A2 IC9.A3 TP_VREG.TP

## Tracks (layer width: path | path; a pad name or v marks a point on that pad's centre or on a via)
3V3/1.7D  (via drill 0.35)
  Top 0.305: IC2.C2 C34.2 43.1,10.64 43.14,10.59 43.14,5.22 42.48,4.56 R7.2 42.26,5.36 v41.7,5.91 | v18.27,5.97 17.49,6.75 R_PWR_EPD.2 16.76,6.67 R5.2 R8.2
  Route15 0.305: v18.27,5.97 18.28,5.96 41.65,5.96 v41.7,5.91
3V3/2.4A  (via drill 0.05, 0.35)
  Top 0.305: C6.1 25.28,12.28 v25.28,12.7 25.7,12.7 26.06,13.06 U1.P$Y2 U1.P$W1 | C8.1 34.34,9.97 C14.1 33.31,11.84 v32.53,11.06 31.83,11.76 U1.P$AD23 | v29.51,11.12 | v29.51,11.12 29.43,11.04 | 29.43,11.04 C7.1 | v11.45,29.49 10.31,30.63 IC9.E2 IC9.E3 11.15,30.21 12.11,30.21 13.35,28.98 C33.1 v13.98,28.02 v13.98,28.01 | v35.48,19.08 36.69,17.87 TP_3.3V.TP | J2.1 38.23,22.55 v36.26,22.55 | v22.03,19.35 23.06,19.35 C19.1 24.71,19.02 C12.1 25.67,19.58 v25.67,18.48 U1.P$B1 | IC3.10 21.07,13.95 21.07,15.76 | 21.07,15.76 22.16,15.76 IC3.7 | R18.1 3.59,29.85 v4.77,29.85 4.08,29.85 TP_3V3.TP 2.78,30.89 R17.1 | U1.P$AD14 29.43,11.71 29.43,11.04 | v31.18,19.1 31.33,18.94 U1.P$A22 | IC3.3 v24.66,15.01 | 21.07,15.76 v21,16.65 | v29.51,11.12 C25.1
  Route2 0.305: v31.18,19.1 31.2,19.08 v35.48,19.08 35.48,21.77 v36.26,22.55 | v13.98,28.01 22.03,19.96 v22.03,19.35 20.82,19.7 20.26,19.02 v21,16.65 | v11.45,29.49 10.43,29.24 8.79,29.28 8.2,29.81 4.8,29.81 v4.77,29.85
  Route15 0.305: v31.18,19.1 26.29,19.1 v25.67,18.48 25.16,17.82 25.76,15.94 24.73,14.99 | v32.53,11.06 32.47,11.12 v29.51,11.12 28.78,10.39 28.39,10.39 26.08,12.7 v25.28,12.7 25.34,14.2 24.73,14.99 | 24.73,14.99 v24.66,15.01
DEC1
  Top 0.152: C5.1 21.89,18.45 24.64,18.45 25.79,17.3 U1.P$C1
DEC3
  Top 0.152: C11.1 33.29,18.41 32.73,17.6 32.02,17.06 U1.P$D23
DEC4_6  (via drill 0.35)
  Top 0.152: U1.P$B5 27.08,19.22 C16.1 26.97,19.34 28.85,19.34 29.02,19.5 C15.1 | C15.1 28.03,20.75 C10.1 27.17,20.68 27.13,20.71 27.13,22.04 27.83,22.04 27.95,22.17 L3.2 | C15.1 29.02,20.18 v29.35,19.84
  Top 0.305: v33.52,17.02 33.3,16.81 U1.P$E24
  Route2 0.152: v29.35,19.84 31.56,17.63 33.09,17.63 33.52,17.21 v33.52,17.02
DN
  Top 0.152: D3.1 25.28,26.49 J4.B7 25.28,28.93 25.02,29.19 24.45,29.19 24.28,29.02 J4.A7
DP
  Top 0.152: J4.B6 23.78,27.55 | 23.78,27.55 23.78,26.78 D3.3 | J4.A6 24.78,27.54 24.51,27.28 24.05,27.28 23.78,27.55
EPD_3V3
  Top 0.152: J1.16 J1.15 11.54,16.26 11.92,16.64 11.92,18.25 11.98,18.31 12.56,18.31
  Top 0.305: 12.56,18.31 EPD_C5.2 13.65,19.06 13.74,19.15 14.49,19.15 15.06,19.72 C1-EP-DR.1 17.55,20.58 17.57,20.56 18.68,21.68 L5.1 18.68,24.83 DMG2305UX-7.2 19.06,26.35 DMG2305UX-7.3
GDR
  Top 0.152: Q3.1 11.1,22.76 J1.2 10.41,22.67 9.4,22.67 9.4,25.35 R2_EP_DR.2
GND  (via drill 0.05, 0.35)
  Top 0.152: R9.1 6.83,25.43 6.95,25.55 IC1.D2 | C39.2 8.6,27.52 C23.2 | C39.2 9.64,28.08 C37.2 10.39,26.14 R2_EP_DR.1 | IC3.9 21.98,14.45 v21.77,14.66 | C18.1 23.89,17.17 23.59,17.38 23.21,17.41 22.64,17.48 | 21.68,17.41 v21.62,17.48 | U1.P$B7 27.58,17.16 U1.P$75 | C39.2 9.64,29.34 8.13,30.85 8.31,31.88 9.74,31.62 IC9.C1 IC9.C2 IC9.C3 | C31.1 13.41,6.23 v13.46,6.18 | v14.71,4.35 14.14,3.79 SW_ENT.1 | U1.P$F23 U1.P$78 | J1.8 10.98,19.76 v11.81,18.92 | C22.2 35.61,31.32 35.58,31.28 35.58,30.83 C4.2 | v28.18,19.95 v28.18,19.96 C16.2 | U1.P$74 U1.P$84 | v14.21,10.58 13.6,10.58 EPD_C11.1 | v22.5,12.57 23.51,11.56 C6.2 | X1.4 33.55,21.05 C1.2 | IC2.B3 v43.61,12.66 | v40.64,12.7 IC2.B1 | v14.24,12.13 13.42,12 EPD_C10.1 | v15.18,17.16 EPD_C5.1 | C21.2 6.78,32.14 v5.02,32.14 | C24.1 5.52,33.66 v5.52,33.71 | C5.2 v21.62,17.48 | v21.62,17.48 22.57,17.49 22.64,17.48 | C17.1 22.64,17.48
  Top 0.305: C1.2 33.97,19.56 C11.2
  Route2 0.152: v21.62,17.48 21.62,14.81 v21.77,14.66 22.5,13.93 v22.5,12.57 | v11.81,18.92 13.42,18.92 v15.18,17.16 | v28.18,19.95 28.18,19.03 27.58,18.43 U1.P$B7 | v43.61,12.66 v40.64,12.7
  Route15 0.152: v13.46,6.18 14.71,4.94 v14.71,4.35 | v14.24,12.13 14.21,12.11 v14.21,10.58 | v5.52,33.71 5.52,33.63 4.72,32.83 4.72,32.44 v5.02,32.14
  other vias: 27.58,17.81
  pour Top: 8.52,9.73 7.81,9.02 7.78,9.01 0.94,9.01 0.94,5.05 6.39,-0.4 7.11,0.33 7.14,0.34 42.24,0.34 47.1,5.2 47.1,27.39 45.84,28.65 36.81,28.65 36.78,28.66 36.76,28.68 36.75,28.71 36.75,28.74 36.76,28.77 37.06,29.06 37.06,32.15 33.11,36.09 4.62,36.09 4.74,36 4.74,36 4.75,36 4.76,35.99 4.76,35.98 4.76,35.98 4.77,35.97 4.77,35.96 4.77,35.96 4.78,35.95 4.78,35.94 4.78,35.93 4.78,35.93 4.78,35.92 4.77,35.91 4.77,35.9 4.77,35.9 4.76,35.89 4.76,35.89 4.75,35.88 4.75,35.88 4.74,35.87 4.73,35.87 4.73,35.86 4.72,35.86 4.72,35.86 4.71,35.86 4.7,35.86 4.69,35.86 2.05,35.86 0.41,34.22 0.41,27.63 0.39,27.61 -2.02,25.2 6.89,25.2 7.19,25.49 7.22,25.5 7.25,25.5 7.27,25.49 8.52,24.24 8.53,24.22 8.53,9.76
  pour Route2: 7.91,9.5 7.89,9.48 7.86,9.47 2.05,9.47 -0.36,7.06 -0.36,6.89 6,0.52 6.11,0.63 6.14,0.65 43.39,0.65 46.72,3.97 46.72,27.93 46.22,28.42 37.12,28.42 37.09,28.43 37.07,28.45 37.06,28.48 37.06,28.51 37.07,28.54 37.82,29.29 37.82,32.15 35.03,34.94 2.2,34.94 -1.2,31.53 -1.2,25.43 6.55,25.43 6.58,25.41 7.91,24.09 7.92,24.06 7.92,9.53
  pour Route15: -1.23,4.92 5.42,-0.32 43.42,0.08 48.13,3.9 48.06,27.98 37.69,28.5 37.68,28.5 37.68,28.5 37.67,28.5 37.66,28.51 37.65,28.51 37.65,28.51 37.64,28.52 37.64,28.52 37.63,28.53 37.63,28.53 37.62,28.54 37.62,28.55 37.61,28.56 37.61,28.56 37.61,28.57 37.61,28.58 37.32,32.37 34.02,36.08 19.5,36.02 19.48,36.02 19.48,36.02 19.48,36.02 19.47,36.03 19.45,36.03 19.45,36.03 10.99,36.33 -0.99,35.07 -1.77,24.75 7.89,24.92 7.9,24.92 7.9,24.92 7.9,24.92 7.92,24.91 7.93,24.91 7.93,24.91 7.93,24.91 7.94,24.9 7.95,24.89 7.95,24.89 7.95,24.89 7.96,24.87 7.96,24.86 7.96,24.86 7.96,24.86 7.96,24.84 8.61,11.2 8.61,11.2 8.62,11.18 8.62,11.17 8.62,11.17 8.62,11.17 8.61,11.15 8.61,11.14 8.61,11.14 8.61,11.14 8.6,11.13 8.59,11.12 8.58,11.12 8.58,11.11 8.57,11.11 8.56,11.1 8.56,11.1 8.56,11.1 8.54,11.1 8.53,11.1 8.53,11.1 -1.63,10.7
IMU_INT1  (via drill 0.05, 0.35)
  Top 0.152: IC3.5 23.5,16.53 v23.23,16.8
  Route2 0.152: U1.P$N1 25.16,15.48 24.48,15.48 23.23,16.73 v23.23,16.8
  other vias: 25.83,14.81
IMU_INT2  (via drill 0.35)
  Top 0.152: v23.44,12.7 23.78,12.71 26.22,14.56 U1.P$P2 | v22.32,16.66 23,15.97 IC3.6
  Route2 0.152: v23.44,12.7 23.6,12.87 23.6,15.38 v22.32,16.66
LX1
  Top 0.152: L7.1 13.16,31.85 IC9.B3 IC9.B2
LX2
  Top 0.152: L7.2 12.12,30.78 11.85,31.05 IC9.D3 IC9.D2
N$1
  Top 0.152: R9.2 5.62,26.52 5.62,26.71 IC1.D1
N$2  (via drill 0.35)
  Top 0.152: R4.2 4.61,33.16 v5.84,32.75 | v8.84,31.15 IC9.D1
  Route2 0.152: v5.84,32.75 8.37,32.78 v8.84,31.15
N$3  (via drill 0.35)
  Top 0.152: v9.93,29.98 IC9.E1 | R2.2 v5.62,29.12
  Route15 0.152: v5.62,29.12 6.1,29.61 6.1,30.46 7.2,31.55 7.48,31.55 8.67,30.36 9.55,30.36 v9.93,29.98
N$4
  Top 0.152: U1.P$AC5 C20.1
N$5
  Top 0.152: D4.2 18.88,12.58 C2-EP-DR.1 17.97,9.19 17.12,8.34 D2.1
N$6
  Top 0.152: C9.1 U1.P$N24
N$7  (via drill 0.35)
  Top 0.152: Q3.3 15.54,24.23 L5.2 18,23.15 v18,22.64 | D5.2 17.94,15.93 | 17.94,15.93 17.97,15.9 C2-EP-DR.2 | v19.53,16.71 18.75,15.93 17.94,15.93
  Route2 0.152: v18,22.64 19.53,21.12 v19.53,16.71
N$8  (via drill 0.35)
  Top 0.152: U1.P$H23 31.95,16.17 34.61,16.17 C3.1 34.73,16.29 34.73,17.71 v34.75,17.73 | L1.1 34.76,24.31 v34.75,24.3
  Route15 0.152: v34.75,24.3 v34.75,17.73
N$9  (via drill 0.35)
  Top 0.152: R3.2 13.82,8.19 v13.85,8.22 | v21.83,13.24 21.83,13.29 21.96,13.43 23.85,13.45 IC3.1
  Route15 0.152: v13.85,8.22 18.88,13.24 v21.83,13.24
N$10
  Top 0.152: U1.P$B24 32.33,19.67 32.72,20.06 C1.1 32.18,20.84 32.18,21.99 32.41,22.22 34.25,22.22 X1.1
N$11
  Top 0.152: J4.B5 22.68,28.12 R2_USB.1
N$12
  Top 0.152: 8.56,7 SJ1.2 | R_TYPE_SEL.2 7.44,6.97 7.46,6.99
  Top 0.305: SJ1.2 7.46,6.99 | 8.56,7 R1_EP_DR.1
N$13
  Top 0.152: C13.1 30.67,19.73 30.33,18.86 U1.P$A18
N$14
  Top 0.152: ANT1.1 39.79,30.94 36.61,30.32 C4.1 | C22.1 36.36,32.03 C4.1 | C4.1 36.36,29.37 L1.2
N$15
  Top 0.152: C32.2 42.38,13.59 IC2.A2
N$16
  Top 0.152: J4.A5 25.78,27.4 25.87,27.3 26.35,27.3 26.37,27.28 R1_USB.2
N$19
  Top 0.152: U1.P$A23 31.83,21.94 C2.1 32.75,22.61 X1.3
N$20
  Top 0.152: L3.1 26.95,22.46 L2.2
N$21
  Top 0.152: L2.1 26.35,18.19 26.58,17.95 U1.P$B3
N$27
  Top 0.152: EPD_C6.2 10.95,14.76 J1.18
N$28
  Top 0.152: EPD_C7.2 11.56,14.26 J1.19
N$29
  Top 0.152: EPD_C8.2 12.49,13.76 J1.20
N$31
  Top 0.152: EPD_C10.2 11.61,12.76 J1.22
N$33
  Top 0.152: EPD_C12.2 10.52,11.39 J1.24
N$34
  Top 0.152: EPD_C2.2 13.75,21.76 J1.4
N$35
  Top 0.152: EPD_C1.2 13.57,21.26 J1.5
OUT+
  Top 0.152: TP_OP.TP 44.72,13.54 IC2.A3
OUT-
  Top 0.152: TP_ON.TP 42.82,12.28 IC2.C3
P0.00/XL1  (via drill 0.35)
  Top 0.152: U1.P$D2 26.25,16.98 25.25,16.98 v24.42,17.81 24.25,17.98 C17.2 | X2.1 v30.7,24.47 v30.7,24.46
  Route2 0.152: v30.7,24.46 24.42,18.18 v24.42,17.81
P0.01/XL2  (via drill 0.35)
  Top 0.152: U1.P$F2 26.24,16.65 24.92,16.65 C18.2 24.66,16.73 v24.8,16.1 | X2.2 33.08,25.85 v33.08,24.46
  Route2 0.152: v33.08,24.46 32.47,23.85 30.91,23.85 26.89,19.83 26.89,18.19 v24.8,16.1
P0.13/1.5D
  Top 0.152: SW_UP.2 21.4,3.88 C30.2 19.74,2.81 R5.1
P0.14/1.5D
  Top 0.152: SW_ENT.2 10.54,3.92 C31.2 R8.1
P1.01/1.6C  (via drill 0.35)
  Top 0.152: DMG2305UX-7.1 14.58,25.2 v13.39,26.39 | v13.88,7.14 14.04,7.3 R_PWR_EPD.1
  Route15 0.152: v13.39,26.39 12.46,25.45 12.46,8.57 v13.88,7.14
P1.02/1.6C  (via drill 0.35)
  Top 0.152: SW_DN.2 32.55,3.76 v31.17,5.14 28.05,5.14 C29.2 | R7.1 v40.58,4.57
  Route2 0.152: v40.58,4.57 40,5.14 v31.17,5.14
PMIC_INT  (via drill 0.05, 0.35)
  Top 0.152: IC1.A1 v4.92,28.52
  Route2 0.152: U1.P$T2 26.46,13.93 26.46,6.91 24.52,4.97 8.05,4.97 7.45,5.57 7.45,24.86 7.29,25.02 2.64,25.02 2.2,25.46 v2.2,29.25
  Route15 0.152: v2.2,29.25 2.27,29.18 4.26,29.18 v4.92,28.52
  other vias: 26.33,14.06
PREVGH
  Top 0.152: J1.21 10.57,13.21 13.2,13.21 EPD_C9.2 14.04,13.75 15.59,13.75 15.82,13.98 15.82,18.29 16.24,18.71 17.11,18.71 D5.1
PREVGL
  Top 0.152: EPD_C11.2 12.27,10.81 12.25,10.82 12.25,10.88 | D2.2 15.14,11.4 12.25,11.4 12.25,10.88 | 12.25,10.88 11.75,10.88 11.58,11.05 11.58,11.78 11.1,12.26 J1.23
RESE
  Top 0.152: Q3.2 11.9,22.26 J1.3 9.22,22.26 9.16,22.2 9.16,7.71 R1_EP_DR.2
RESET  (via drill 0.35)
  Top 0.152: TP_RESET.TP 43.48,25.42 42.07,25.42 41.05,24.4 J2.6
  Top 0.305: J2.6 41.65,23.49 v42.07,23.49 | v28.59,11.21 28.59,11.82 U1.P$AC13
  Route2 0.305: v42.07,23.49 42.75,23.49 43.66,22.58 43.66,18.9 36.87,12.11 29.48,12.11 v28.59,11.21
SCL/1.4C  (via drill 0.35)
  Top 0.152: U3.7 v37.85,7.28 v37.86,7.27 | IC2.C1 v41.54,11.91
  Route2 0.152: v37.86,7.27 41.54,10.94 v41.54,11.91
SCL/2.4C  (via drill 0.05, 0.35)
  Top 0.152: 5.58,27.79 3.78,27.79 1.4,27.36 | 5.58,27.79 5.63,27.85 5.71,27.85 5.88,28.01 IC1.B1 | 5.58,27.79 5.01,27.23 v4.74,27.23 | IC3.12 23.64,14.06 25.06,14.06 26.07,15.07 26.34,15.07 U1.P$M2 | R17.2 1.04,28.78 TP_SCL.TP 1.4,27.36 | v2.92,28.41 1.4,27.36 | R4.1 3.13,33.21 v2.98,33.06
  Route2 0.152: U1.P$M2 26.33,14.72 23.46,11.85 22.04,11.85 7.36,26.52 5.47,26.52 5.46,26.51 v4.74,27.23 | v2.98,33.06 2.92,32.99 v2.92,28.41
  other vias: 26.33,15.06
SDA/1.4C
  Top 0.152: U3.8 39.94,10.97 39.94,13.87 41.54,13.87 42.32,13.09 IC2.B2
SDA/2.4C  (via drill 0.05, 0.35)
  Top 0.152: v19.1,13.91 20.25,12.76 TP_SDA.TP | v4.83,26.17 4.83,26.44 6,27.61 IC1.C1 | U1.P$L1 25.03,14.51 24.09,14.51 IC3.2 23.99,14.48 v23.05,14.48 | R18.2 3.32,29.02 | v3.84,28.5 3.32,29.02 | 3.32,29.02 3.2,29.15 R2.1
  Route2 0.152: v19.1,13.91 19.1,14.32 7.25,26.17 v4.83,26.17 3.48,27.52 3.48,28.14 v3.84,28.5
  Route15 0.152: v19.1,13.91 22.49,13.91 v23.05,14.48
SWDCLK  (via drill 0.35)
  Top 0.152: J2.4 38.82,25.05 v38.82,25.11 | U1.P$AA24 32.33,12.83 33.71,14.2 v34.41,13.5 | v39.83,7.06 TP_SWDCLK.TP
  Route15 0.152: v34.41,13.5 39.83,8.08 v39.83,7.06 39.83,8.59 38.97,9.45 38.97,24.96 v38.82,25.11
SWDIO  (via drill 0.35)
  Top 0.152: J2.2 37.86,24.1 v37.57,24.38
  Top 0.305: U1.P$AC24 32.87,12.31 33.38,12.83 v33.38,13.01 | v36.05,15.74 TP_SWDIO.TP
  Route15 0.152: v33.38,13.01 33.38,13.84 35.29,15.74 v36.05,15.74 38.58,18.27 38.58,21.63 38.5,21.63 37.96,22.17 37.96,23.99 v37.57,24.38
SWO
  Top 0.152: U1.P$AD22 TP_SWO.TP
VBAT/1.2A
  Top 0.305: TP_VBAT.TP 39.26,2.88 37.3,4.84 34.08,4.84 33.16,5.77 33.16,5.98 33.95,6.78 U3.3 U3.2 34.44,6.94 C27.2
VBAT/2.5C
  Top 0.305: C37.1 9,26.93 7.58,26.93 6.91,27.61 IC1.C2
VBUS/1.5D  (via drill 0.35)
  Top 0.152: D3.5 24.54,23.94
  Top 0.305: J4.A4_B9 26.93,25.27 C43.1 27,24.14 v27.02,24.12 | 24.54,23.94 v24.54,22.79 22.91,22.79 21.46,24.24 C42.1 22.13,25.62 J4.A9_B4
  Route15 0.152: v27.02,24.12 25.7,22.79 v24.54,22.79
VBUS/2.6D  (via drill 0.35)
  Top 0.305: C38.1 24.61,8.5 25.31,8.5 26.33,9.52 U1.P$AD2 26.33,11.67 25.35,10.69 25.35,10.7 23.31,10.7 20.26,13.75 20.26,22.12 v20.69,22.55 | C21.1 6.57,30.94 v6.57,29.11 6.52,29.05 IC1.A2
  Route2 0.305: v6.57,29.11 7.26,28.42 11.69,28.42 11.71,28.4 12.94,29.63 13.61,29.63 v20.69,22.55
VREG  (via drill 0.35)
  Top 0.305: IC9.A1 8.5,33.66 C24.2 | IC1.B2 7.24,28.01 | 7.24,28.01 8.09,28.01 C39.1 8.2,28.56 v7.65,29.11 | v7.55,30.51 7.55,31.78 8.1,32.33 9.83,32.33 IC9.A1 | C23.1 7.83,27.43 7.24,28.01 | IC9.A1 IC9.A2 IC9.A3 10.71,33.67 TP_VREG.TP
  Route15 0.152: v7.55,30.51 7.65,30.41 v7.65,29.11